# EAGLE board sprite (EAGLE 6.6.0)
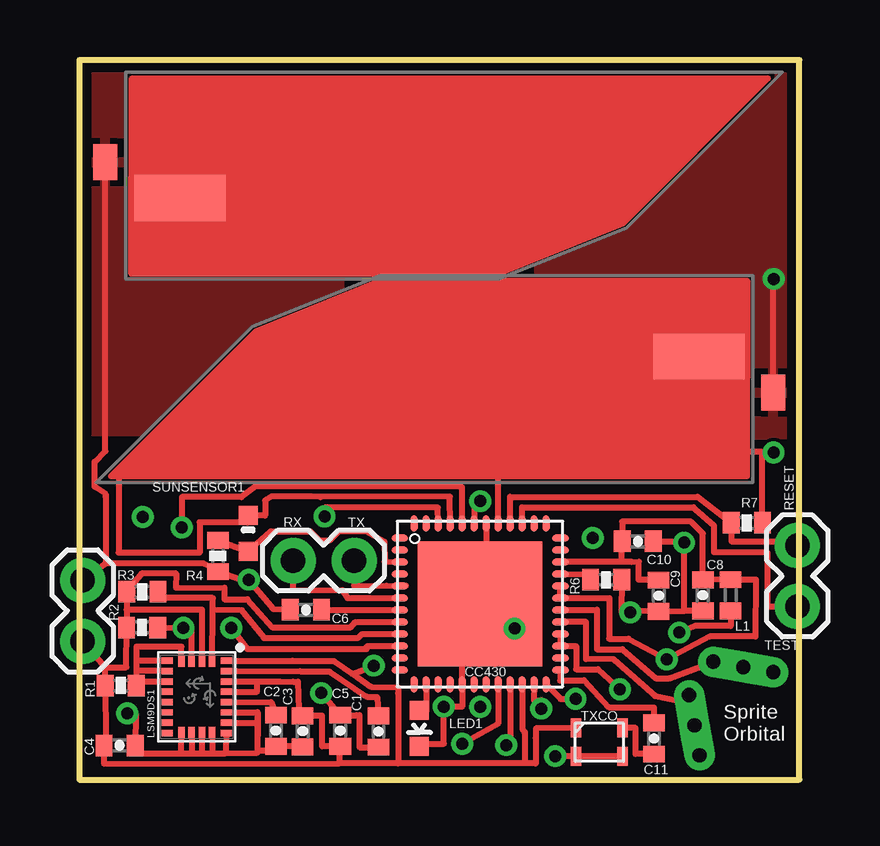
[diagram p0: board, top side]
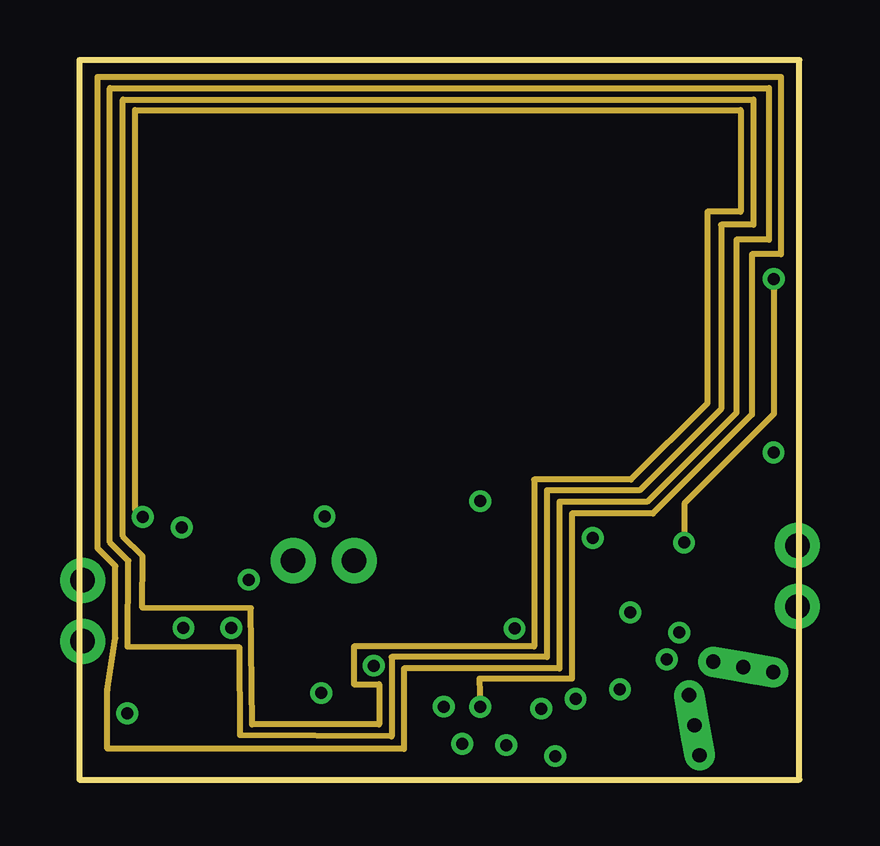
[diagram p1: board, inner layer Route2]
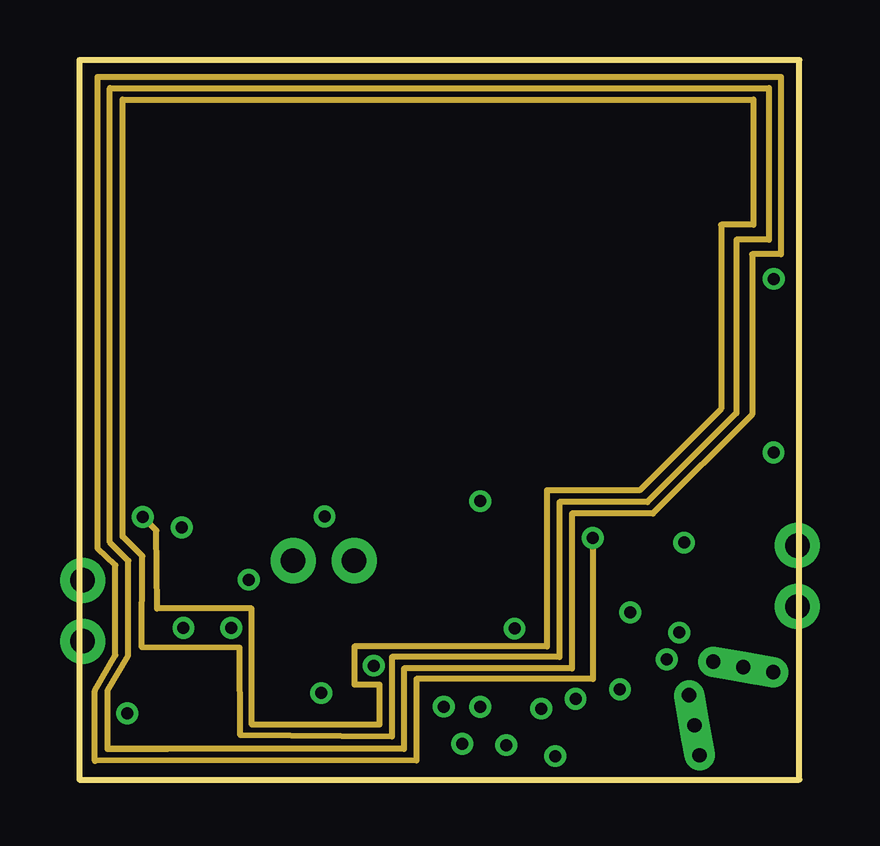
[diagram p2: board, inner layer Route15]
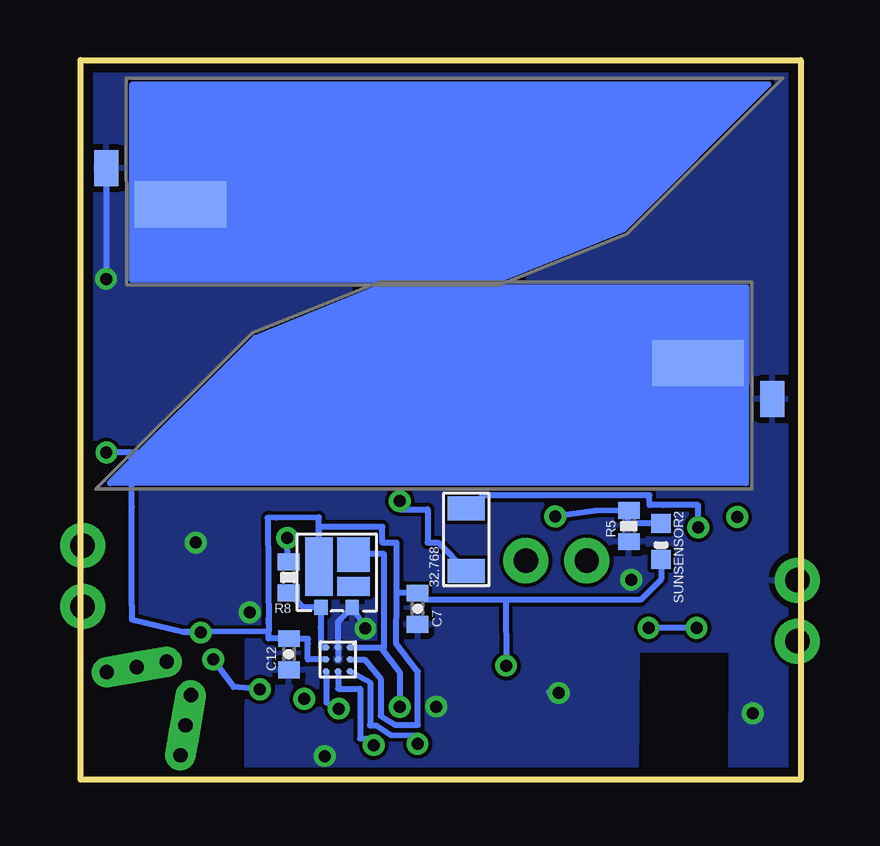
[diagram p3: board, bottom side, seen from below]

Size 30 x 30 mm. Coordinates in mm from the lower left corner, seen from the top.
Outline: 0,0 30,0 30,30 0,30 0,0
Copper layers (1*2*15*16): Top 0.035559375mm / dielectric 1.501140625mm / Route2 0.035559375mm / dielectric 0.149859375mm / Route15 0.035559375mm / dielectric 0.200659375mm / Bottom 0.035559375mm
Design rules "typical_4pcb *": minimum track width 10mil, minimum drill 15mil, track to track 6mil, track to pad 6mil, pad to pad 6mil, via to via 6mil, smd to smd 6mil, copper to edge 15mil, drill to drill 8mil, minimum pad ring 10mil, minimum via ring 8mil, stop-mask expansion 4mil, vias tented up to drill 0mil, thermal gap 10mil

## Footprints (pad centres in the part's own frame; a part is rotated, then mirrored left to right if it is on the bottom)
SPRITECRYSTAL = smd 1 x 1.55: PIN1 -1.3,0; PIN2 1.3,0
ANTENNA = drill 0.6 pad 1.27 square: IN1 0,0 | drill 0.6 pad 1.27 offset: IN2 1.27,0; IN3 -1.27,0
0402-CAP = smd 0.7 x 0.9: 1 -0.65,0; 2 0.65,0
RGZ48 = smd 0.7 x 0.3: 1 -3.35,2.75; 2 -3.35,2.25; 3 -3.35,1.75; 4 -3.35,1.25; 5 -3.35,0.75; 6 -3.35,0.25; 7 -3.35,-0.25; 8 -3.35,-0.75; 9 -3.35,-1.25; 10 -3.35,-1.75; 11 -3.35,-2.25; 12 -3.35,-2.75; 25 3.35,-2.75; 26 3.35,-2.25; 27 3.35,-1.75; 28 3.35,-1.25; 29 3.35,-0.75; 30 3.35,-0.25; 31 3.35,0.25; 32 3.35,0.75; 33 3.35,1.25; 34 3.35,1.75; 35 3.35,2.25; 36 3.35,2.75 | smd 0.3 x 0.7: 13 -2.75,-3.35; 14 -2.25,-3.35; 15 -1.75,-3.35; 16 -1.25,-3.35; 17 -0.75,-3.35; 18 -0.25,-3.35; 19 0.25,-3.35; 20 0.75,-3.35; 21 1.25,-3.35; 22 1.75,-3.35; 23 2.25,-3.35; 24 2.75,-3.35; 37 2.75,3.35; 38 2.25,3.35; 39 1.75,3.35; 40 1.25,3.35; 41 0.75,3.35; 42 0.25,3.35; 43 -0.25,3.35; 44 -0.75,3.35; 45 -1.25,3.35; 46 -1.75,3.35; 47 -2.25,3.35; 48 -2.75,3.35 | smd 5.2 x 5.2: TP 0,0
LV8417CS = smd 0.27 x 0.27: ENA 0.5,-0.5; IN1 0,-0.5; IN2 -0.5,-0.5; OUT1 0.5,0.5; OUT2 -0.5,0.5; PGND 0,0.5; SGND 0,0; VCC 0.5,0; VM -0.5,0
1X02 = drill 1.016 pad 1.88: 1 0,0; 2 2.54,0
C0402 = smd 0.7 x 0.9: 1 -0.65,0; 2 0.65,0
LED-0603 = smd 0.8 x 0.8: A 0,-0.75; C 0,0.75
LGA24-8X4 = smd 0.27 x 0.45: 1 -1.505,1.225; 6 -1.505,-1.225; 7 -1.075,-1.225; 8 -0.645,-1.225; 9 -0.215,-1.225; 10 0.215,-1.225; 11 0.645,-1.225; 12 1.075,-1.225; 13 1.505,-1.225; 18 1.505,1.225; 19 1.075,1.225; 20 0.645,1.225; 21 0.215,1.225; 22 -0.215,1.225; 23 -0.645,1.225; 24 -1.075,1.225 | smd 0.45 x 0.27: 2 -1.475,0.645; 3 -1.475,0.215; 4 -1.475,-0.215; 5 -1.475,-0.645; 14 1.475,-0.645; 15 1.475,-0.215; 16 1.475,0.215; 17 1.475,0.645
0402-RES = smd 0.7 x 0.9: 1 -0.65,0; 2 0.65,0
NSR1030QMUTAG = smd 0.55 x 0.633: GND -0.65,1.335; PIN3 0.65,1.335 | smd 1.35 x 0.8: P$2 -0.706,0.453 | smd 1.35 x 1.45: PIN1 -0.7,-0.865 | smd 1.15 x 2.45: VCC 0.738,-0.365
ALS-PT19 = smd 0.8 x 0.8: C -0.75,0; E 0.75,0
TRISOLX-T01 = smd 3.81 x 1.93: P$2 -2,5 | smd 1 x 1.5: P$3 1.1,3.5
TXC_7Z = smd 0.44 x 0.79: GND1 -0.97,-0.595; GND2 0.97,-0.595; OUT 0.97,0.595; VCC -0.97,0.595

## Placement (x,y rotation side)
32KHZ  SPRITECRYSTALSPRITECRYSTAL  [SPRITECRYSTAL]  13.93,10 90 bottom
ANTENNA1  ANTENNA  [ANTENNA]  25.63,2.26 100 top
ANTENNA2  ANTENNA  [ANTENNA]  27.66,4.69 170 top
C1  0.1uF  [0402-CAP]  12.47,2 270 top
C2  10nF  [0402-CAP]  8.2,2.04 270 top
C3  0.1uF  [0402-CAP]  9.31,2.01 270 top
C4  0.1uF  [0402-CAP]  1.68,1.42 0 top
C5  10uF  [0402-CAP]  10.87,2.04 90 top
C6  470nF  [0402-CAP]  9.44,7.08 0 top
C7  10uF  [0402-CAP]  15.96,7.12 90 bottom
C8  10nF  [0402-CAP]  25.98,7.68 270 top
C9  0.1uF  [0402-CAP]  24.14,7.67 270 top
C10  470nF  [0402-CAP]  23.27,9.93 0 top
C11  10nF  [0402-CAP]  23.95,1.71 270 top
C12  10uF  [0402-CAP]  21.32,5.23 90 bottom
CC430  CC430F513X---RGZ48  [RGZ48]  16.7,7.32 0 top
H-BRIDGE  LV8417CS  [LV8417CS]  19.28,5.01 0 bottom
JP1  [1X02]  11.45,9.13 180 top
JP2  [1X02]  0.14,5.77 90 top
JP3  [1X02]  29.92,9.75 270 top
L1  12nH  [C0402]  27.14,7.69 90 top
LED1  [LED-0603]  14.17,2.14 180 top
LSM9DS1  LSM9DS1  [LGA24-8X4]  4.89,3.45 270 top
R1  10K  [0402-RES]  1.73,3.92 180 top
R2  10K  [0402-RES]  2.62,6.34 180 top
R3  10K  [0402-RES]  2.63,7.83 180 top
R4  10K  [0402-RES]  5.77,9.32 90 top
R5  10K  [0402-RES]  7.16,10.57 90 bottom
R6  56K  [0402-RES]  21.95,8.33 180 top
R7  56K  [0402-RES]  27.81,10.7 180 top
R8  1K  [0402-RES]  21.33,8.43 270 bottom
RECTIFIER  NSR1030QMUTAG  [NSR1030QMUTAG]  19.34,8.51 180 bottom
SUNSENSOR1  LIGHTSENSORALS  [ALS-PT19]  7.04,10.26 270 top
SUNSENSOR2  LIGHTSENSORALS  [ALS-PT19]  5.82,9.93 90 bottom
TRISOL1  TRISOLX-WING  [TRISOLX-T01]  2.19,29.24 180 top
TRISOL2  TRISOLX-WING  [TRISOLX-T01]  27.82,12.64 0 top
TRISOL3  TRISOLX-WING  [TRISOLX-T01]  2.28,12.36 0 bottom
TRISOL4  TRISOLX-WING  [TRISOLX-T01]  27.84,28.98 180 bottom
TXCO  [TXC_7Z]  21.67,1.56 0 top

## Library data of the parts
32KHZ = SpriteCrystal
ANTENNA1 ANTENNA2 = SpriteAntenna
C1-C12 R1-R8 = SparkFun-Passives
CC430 = TI_MSP430_v16
H-BRIDGE = lv8417cs
JP1-JP3 L1 LED1 = SparkFun
LSM9DS1 = SparkFun-Sensors; PROD_ID: IC-12536
RECTIFIER = NSR1030QMUTAG
SUNSENSOR1 SUNSENSOR2 = SparkFun-Sensors; PROD_ID: IC-11836
TRISOL1-TRISOL4 = TriSolX_QzQube
TXCO = SpriteTCXO

## Nets
#RST/SBWTDIO: CC430.40 JP3.1 R7.2
ANT1: ANTENNA1.IN1 ANTENNA1.IN2 ANTENNA1.IN3 CC430.29
ANT2: ANTENNA2.IN1 ANTENNA2.IN2 ANTENNA2.IN3 CC430.30
COIL1: H-BRIDGE.OUT1 R8.1 RECTIFIER.PIN1
GND: C1.2 C2.2 C3.2 C4.2 C5.2 C6.1 C7.1 C8.2 C9.2 C10.2 C12.1 CC430.17 CC430.42 CC430.TP H-BRIDGE.PGND H-BRIDGE.SGND JP2.2 LED1.C LSM9DS1.14 LSM9DS1.15 LSM9DS1.16 LSM9DS1.17 LSM9DS1.18 LSM9DS1.19 LSM9DS1.20 R4.1 R5.1 R6.1 RECTIFIER.GND TRISOL1.P$3 TRISOL2.P$3 TRISOL3.P$3 TRISOL4.P$3 TXCO.GND1 TXCO.GND2
GUARD: C8.1 C9.1 C10.1 CC430.27 CC430.28 CC430.31 CC430.32 CC430.34 L1.2
LOADLINE: H-BRIDGE.OUT2 R8.2 RECTIFIER.PIN3
N$1: C1.1 LSM9DS1.24
N$2: C2.1 LSM9DS1.21
N$3: LSM9DS1.5 LSM9DS1.6 LSM9DS1.7 LSM9DS1.8 R1.1
N$4: C11.1 CC430.25
N$5: C11.2 TXCO.OUT
N$7: 32KHZ.PIN2 CC430.44
N$8: 32KHZ.PIN1 CC430.43
P1.0: CC430.13
P1.1: CC430.12
P1.2: CC430.11
P1.7: CC430.4
P2.0/A0: CC430.3 R4.2 SUNSENSOR1.E
P2.1/A1: CC430.2
P2.2/A2: CC430.1
P2.2/A4: CC430.47
P2.3/A3: CC430.48
P2.5/A5: CC430.46 R5.2 SUNSENSOR2.E
P2.6: CC430.24
P2.7: CC430.23 H-BRIDGE.IN2
P3.0: CC430.21 H-BRIDGE.IN1
P3.1: CC430.20 H-BRIDGE.ENA
P3.2: CC430.19
P3.3: CC430.18
P3.5: CC430.16
P3.6: CC430.15
P3.7: CC430.14 LED1.A
R_BIAS: CC430.33 R6.2
SCL: CC430.9 LSM9DS1.2 R3.1
SDA: CC430.10 LSM9DS1.4 R2.1
TCK_PJ.3: CC430.38
TDI_PJ.1: CC430.36
TDO_PJ.0: CC430.35
TEST/SBWTCK: CC430.39 JP3.2
TMS_PJ.2: CC430.37
UART_RX: CC430.6 JP1.2
UART_TX: CC430.5 JP1.1
VCC: C3.1 C4.1 C5.1 C7.2 C12.2 CC430.8 CC430.22 CC430.41 CC430.45 H-BRIDGE.VCC H-BRIDGE.VM JP2.1 L1.1 LSM9DS1.1 LSM9DS1.3 LSM9DS1.22 LSM9DS1.23 R1.2 R2.2 R3.2 R7.1 RECTIFIER.VCC SUNSENSOR1.C SUNSENSOR2.C TRISOL1.P$2 TRISOL2.P$2 TRISOL3.P$2 TRISOL4.P$2 TXCO.VCC
VCORE: C6.2 CC430.7

## Tracks (layer width: path | path; a pad name or v marks a point on that pad's centre or on a via)
#RST/SBWTDIO
  Top 0.254: CC430.40 17.95,11.78 25.77,11.78 R7.2 27.17,9.93 29.89,9.93 JP3.1
ANT1
  Top 0.254: ANTENNA1.IN3 ANTENNA1.IN1 ANTENNA1.IN2 25.39,3.19 24,3.48 22.26,5.02 21.12,5.02 21.12,6.57 CC430.29
ANT2
  Top 0.254: ANTENNA2.IN3 ANTENNA2.IN1 ANTENNA2.IN2 24.59,4.22 24.02,4.22 22.62,5.43 21.57,5.43 21.57,7.08 CC430.30
COIL1  (via drill 0.5)
  Route2 0.254: v2.64,10.95 2.33,11.26 2.33,27.91 27.56,27.91 27.56,23.67 26.17,23.67 26.17,15.69 22.99,12.5 18.95,12.5 18.95,5.55 11.45,5.55 11.45,3.98 12.5,3.98 12.5,2.3 7.2,2.29 7.15,7.14 2.63,7.17 2.64,9.32 1.82,10.14 1.82,28.35 28.09,28.35 28.09,23.13 26.74,23.13 26.74,15.45 23.35,12.06 19.48,12.06 19.48,5.11 13.02,5.11 13.02,1.79 6.7,1.85 6.68,5.5 2.02,5.53 2.04,9.12 1.27,9.89 1.27,28.82 28.73,28.82 28.73,22.51 27.38,22.51 27.38,15.29 23.66,11.57 20,11.57 20,4.63 13.52,4.63 13.52,1.28 1.17,1.29 1.17,3.73 1.5,5.89 1.5,8.91 0.76,9.64 0.76,29.3 29.24,29.3 29.24,21.9 28.03,21.9 28.03,15.21 23.9,11.09 20.53,11.09 20.53,4.2 16.67,4.2 v16.71,3.03
  Route15 0.254: v21.4,10.07 21.4,4.2 14.04,4.2 14.04,0.8 0.65,0.78 0.65,3.7 1.5,5.18 1.5,8.94 0.77,9.64 0.77,29.29 29.24,29.29 29.24,21.9 28.03,21.9 28.03,15.22 23.9,11.09 20.53,11.09 20.53,4.63 13.52,4.63 13.52,1.28 1.19,1.28 | 1.19,1.28 3.68,1.28 | 1.19,1.28 1.19,3.71 2.03,5.16 2.04,9.12 1.28,9.89 1.28,28.82 28.73,28.82 28.73,22.5 27.38,22.5 27.38,15.28 23.67,11.57 20,11.57 20,5.11 13.02,5.11 13.02,1.79 6.71,1.84 6.68,5.5 2.61,5.52 2.63,9.31 1.81,10.13 1.81,28.35 28.09,28.35 28.09,23.13 26.74,23.13 26.74,15.45 23.35,12.06 19.48,12.06 19.48,5.55 11.46,5.55 11.46,3.96 12.51,3.96 12.51,2.29 7.19,2.29 7.18,7.13 3.24,7.13 3.21,10.38 v2.64,10.95
  Bottom 0.254: H-BRIDGE.OUT1 17.49,5.51 | 17.49,5.51 17.35,5.51 17.35,9.4 18.64,9.4 RECTIFIER.PIN1 | 17.49,5.51 16.71,4.47 v16.71,3.03 | R8.1 21.38,9.02 v21.4,10.07
GND  (via drill 0.5)
  Top 0.254: C2.2 8.06,1.5 8.05,1.2 7.42,1.19 7.43,2.37 | C2.2 8.21,1.48 | C1.2 11.67,1.34 11.67,2.69 11.55,2.69 C5.2 v10.08,3.6 | CC430.42 16.95,9.34 18.57,9.3 CC430.TP | 7.43,2.37 7.43,2.8 LSM9DS1.20 7.42,2.8 7.42,1.12 6.09,1.09 | LSM9DS1.19 7.43,2.37 | 1.09,11.78 1.09,11.9 | 1.09,11.9 0.67,12.19 0.64,12.22 0.64,13.24 1.09,13.69 TRISOL1.P$3 | C6.1 8.1,7.1 v7.06,8.33 6.75,8.35 R4.1 5.19,9 1.11,9 | v18.14,6.29 18.07,6.16 18.34,6.43 CC430.TP | TXCO.GND1 TXCO.GND2 21.32,0.97 v19.83,0.97 | C3.2 9.32,1.39 C2.2 | v2,2.76 2.35,2.76 C4.2 2.35,1.09 4.22,1.09 | 4.22,1.09 4.68,1.09 | 4.68,1.09 5.11,1.09 | 5.11,1.09 5.54,1.09 | 5.54,1.09 6.09,1.09 | LSM9DS1.14 4.22,1.09 | LSM9DS1.15 4.68,1.09 | LSM9DS1.16 5.11,1.09 | LSM9DS1.17 5.54,1.09 | LSM9DS1.18 6.09,1.09 | v25.2,9.88 25.24,9.95 | LED1.C 14.16,1.5 15.19,1.5 v15.19,3.04 15.95,3.04 CC430.17 15.95,6.57 CC430.TP | R6.1 22.58,6.97 v22.95,6.97 22.95,7.03 C9.2 25.2,7.03 | C10.2 25.03,9.93 v25.2,9.88 | 25.26,9.91 v25.2,9.88 | 25.2,7.03 v25.2,9.88 | C8.2 25.2,7.03 | 1.09,11.9 1.11,9 | 1.11,9 JP2.2 | TRISOL2.P$3 28.92,20.87 v28.94,20.87
  Route2 0.254: v28.94,20.87 28.94,15.24 25.21,11.51 v25.21,9.88 v25.2,9.88
  Bottom 0.254: H-BRIDGE.SGND H-BRIDGE.PGND 19.28,6.58 RECTIFIER.GND v18.14,6.29 | v15.19,3.04 15.31,2.76 | v10.08,3.6 10.49,3.65 | v7.06,8.33 6.75,8.3 | v2,2.76 2.05,3.13 | v19.83,0.97 19.91,0.95 19.99,0.86 | v25.2,9.88 25.16,9.85 | v22.95,6.97 23.04,6.97 | TRISOL4.P$3 v28.94,20.87
  pour Bottom: 0.03,29.71 30.07,29.63 30.01,6.13 23.05,6.01 23.08,0.11 6.85,0.23 6.82,5.4 2.88,5.42 2.92,0.12 -0.17,0.17 -0.17,14.99
  pour Top: 0.08,14.52 30.04,14.36 29.85,29.72 0.11,29.79 0.09,14.54
GUARD  (via drill 0.5)
  Top 0.254: CC430.28 CC430.27 20.7,5.57 20.7,4.59 21.61,4.59 v22.53,3.77 | CC430.32 CC430.31 22.08,7.57 22.08,5.87 22.88,5.87 v24.48,5.01 26.26,5.97 28.17,5.96 28.19,8.34 L1.2 C8.1 25.98,10.25 25.48,10.75 22.62,10.75 C10.1 22.58,9.81 22.59,9.09 | 22.59,9.09 23.01,9.07 23,9.08 CC430.34 | 22.59,9.09 23.32,9.07 | 23.32,9.07 23.29,9.02 | C9.1 23.31,8.32 23.32,9.07
  Bottom 0.254: 24.4,5.08 v24.48,5.01 23.62,3.86 v22.53,3.77
LOADLINE
  Bottom 0.254: 19.99,6.32 RECTIFIER.PIN3 20.73,7.17 R8.2 | 19.99,6.32 19.99,5.51 H-BRIDGE.OUT2 | 20.01,6.35 19.99,6.32
N$1
  Top 0.254: LSM9DS1.24 6.56,4.53 9.2,4.52 10.42,4.5 11.98,3.45 12.41,3.44 12.45,2.66 C1.1
N$2
  Top 0.254: LSM9DS1.21 8,3.22 C2.1
N$3
  Top 0.254: LSM9DS1.5 | R1.1 2.38,4.09 | 2.38,4.09 2.38,4.52 LSM9DS1.7 | 2.38,4.09 LSM9DS1.8 | LSM9DS1.6 2.38,4.95 R1.1 | LSM9DS1.5 4.25,5.54 2.38,5.54 R1.1
N$4
  Top 0.254: CC430.25 20.04,4.12 21.03,4.14 22.07,3.02 23.94,3 C11.1
N$5
  Top 0.254: C11.2 23.18,1.07 23.18,2.15 22.77,2.15 TXCO.OUT
N$7  (via drill 0.5)
  Top 0.254: CC430.44 15.94,10.65 15.94,12.19 15.67,12.23 7.34,12.22 6.75,11.78 4.28,11.78 4.28,11.1 v4.27,10.51
  Bottom 0.254: v4.27,10.51 4.27,11.45 5.71,11.44 6.29,11.45 6.3,11.85 13.2,11.85 32KHZ.PIN2
N$8  (via drill 0.5)
  Top 0.254: v16.7,11.61 16.46,11.47 16.45,11.44 CC430.43
  Bottom 0.254: v16.7,11.61 16.71,11.27 15.54,11.27 15.54,9.88 15.11,9.88 32KHZ.PIN1
P2.0/A0
  Top 0.254: CC430.3 12.72,9.09 12.71,9.92 11.91,10.36 10.82,10.36 10.44,9.97 10,9.97 9.62,10.35 7.98,10.35 SUNSENSOR1.E R4.2
P2.5/A5  (via drill 0.5)
  Top 0.254: CC430.46 14.94,11.34 10.23,11.34 v10.22,10.97
  Bottom 0.254: SUNSENSOR2.E 7.19,10.68 R5.2 8.57,11.2 v10.22,10.97
P2.6  (via drill 0.5)
  Top 0.254: CC430.24 20.06,3.36 v20.68,3.36
P2.7  (via drill 0.5)
  Top 0.254: CC430.23 18.94,3.31 19.25,3.31 v19.24,2.96
  Bottom 0.254: 19.25,3.03 v19.24,2.96 19.76,3.22 H-BRIDGE.IN2
P3.0  (via drill 0.5)
  Top 0.254: CC430.21 17.95,1.52 v17.79,1.44
  Bottom 0.254: 17.77,1.46 v17.79,1.44 18.1,1.7 18.36,1.71 18.35,3.79 19.28,3.79 H-BRIDGE.IN1
P3.1  (via drill 0.5)
  Top 0.254: CC430.20 17.45,2.33 v15.96,1.49
  Bottom 0.254: H-BRIDGE.ENA 17.94,4.05 17.94,2.29 17.94,2.25 17.68,2.25 17.07,1.85 15.96,1.84 v15.96,1.49
P3.7
  Top 0.254: CC430.14 14.45,2.82 LED1.A
R_BIAS
  Top 0.254: CC430.33 21.11,8.55 R6.2
SCL
  Top 0.254: CC430.9 11.78,6.07 11.63,5.91 7.71,5.9 6.78,7.06 5.56,7.08 | LSM9DS1.2 5.56,7.08 | 5.56,7.08 5.57,7.57 3.22,7.58 R3.1
SDA  (via drill 0.5)
  Top 0.254: v6.34,6.33 7,5.44 10.89,5.44 11.96,5.45 12,5.57 CC430.10 | R2.1 v4.34,6.32 4.14,6.32 4.66,6.27 4.66,4.92 LSM9DS1.4
  Bottom 0.254: v4.34,6.32 v6.34,6.33
TEST/SBWTCK
  Top 0.254: CC430.39 18.45,11.35 25.58,11.35 25.66,11.28 26.44,10.59 26.44,9.48 28.66,9.48 28.66,7.22 JP3.2
UART_RX
  Top 0.254: CC430.6 13.31,7.57 11.18,7.57 10.96,7.89 8.89,7.9 JP1.2
UART_TX
  Top 0.254: CC430.5 13.6,8.08 12.8,8.09 11.45,8.08 JP1.1
VCC  (via drill 0.5)
  Top 0.254: CC430.8 13.23,6.57 11.51,6.57 11.31,6.35 8.04,6.35 7,7.51 6.04,7.51 6.04,8 4.03,8 4.03,8.59 2.6,8.59 R3.2 1.98,7.08 | CC430.45 15.45,10.62 15.44,11.79 10.04,11.78 9.67,11.81 8.03,11.81 7.74,11.63 7.74,11.01 SUNSENSOR1.C 7.14,10.93 7.01,10.72 5.01,10.72 5.01,9.45 1.64,9.45 1.65,11.63 1.65,12.81 7.43,17.43 | 10.86,0.69 C5.1 10.1,1.39 10.12,1.39 10.12,2.66 C3.1 9.44,2.51 9.14,2.93 9.11,4.08 8.91,4.08 8.37,4.09 7.41,4.08 | LSM9DS1.23 7.41,4.08 | 13.29,0.67 19.02,0.68 18.98,0.69 18.99,0.68 | 13.29,0.67 10.86,0.69 | LSM9DS1.1 8.88,4.95 9.54,4.95 10.44,4.95 10.61,4.95 11.39,4.4 | 11.39,4.4 12.15,3.87 13.29,3.84 13.29,3.6 13.29,0.67 | LSM9DS1.22 7.41,3.66 7.41,4.08 | TXCO.VCC 19.03,2.13 19.02,1.73 19.03,0.68 18.99,0.68 | 1.08,4.68 R1.2 1.1,1.73 C4.1 1.03,0.66 10.86,0.69 | 1.08,4.68 1.97,4.68 R2.2 1.98,7.08 | 1.98,7.08 5.11,7.08 LSM9DS1.3 | LSM9DS1.3 | CC430.22 18.46,2.1 18.57,1.97 18.56,0.69 18.99,0.68 | 7.43,17.43 9.1,18.2 | 9.1,18.2 18.43,22.47 | 7.43,17.43 7.41,17.43 17.44,15.6 17.45,15.59 CC430.41 | 9.1,18.2 22.94,18.2 22.94,18.61 24.7,18.61 24.7,14.72 26.84,14.7 27.2,14.69 27.41,14.74 27.52,13.65 | L1.1 27.14,6.47 27.14,6.4 25.64,6.4 25.01,6.12 v25,6.13 | JP2.1 1.08,4.68 | 11.39,4.4 v12.27,4.75 | 27.52,13.65 27.62,12.79 | R7.1 28.46,13.63 | 28.46,13.63 v28.93,13.63 | 28.46,13.63 28.46,13.65 27.52,13.65
  Top 0.406: TRISOL2.P$2 TRISOL1.P$2 18.43,22.47 14.29,22.05 16.32,18.3
  Bottom 0.254: RECTIFIER.VCC | H-BRIDGE.VCC 18.16,5.01 17.5,4.2 17.5,2.66 16.89,2.28 16.84,2.27 15.95,2.28 15.95,4.51 15.97,4.52 16.84,5.65 16.83,7.79 | 16.83,7.79 16.83,8.87 16.83,9.87 17.43,9.87 17.43,10.55 20.06,10.55 20.03,8.87 | 22.6,16.8 12.39,18.7 20.88,27.2 TRISOL4.P$2 TRISOL3.P$2 2.64,16.75 | 22.6,16.8 23.94,14.73 | 25.71,6.15 27.87,6.67 27.86,7.24 27.86,11.37 27.87,12.45 27.87,13.63 v28.93,13.63 27.15,13.62 22.6,16.8 | 25.71,6.15 24.98,6.15 | 22.18,6.71 22.16,6.18 | 22.16,6.18 25.05,6.16 | 25.05,6.16 25.71,6.15 | RECTIFIER.VCC 20.08,10.93 21.84,10.91 22.13,10.92 22.17,10.9 | 22.17,10.9 22.21,10.91 22.16,6.18 | RECTIFIER.VCC 20.03,8.87 | 20.03,8.87 20.03,8.86 | 22.2,10.82 22.17,10.92 22.17,10.9 | 16.83,7.79 16.83,7.77 C7.2 15.69,7.5 12.29,7.5 | SUNSENSOR2.C 5.82,8.35 6.67,7.5 12.29,7.5 | H-BRIDGE.VM 20.54,5.01 20.54,5.66 20.54,5.86 20.54,5.88 C12.2 22.16,5.88 22.16,6.18 | v25,6.13 25.02,6.02 25,6.1 25.05,6.16 | 12.33,4.87 v12.27,4.75 12.29,7.5
VCORE
  Top 0.254: C6.2 10.08,6.95 10.36,7.08 13.15,7.07 CC430.7

## Text on the board
tPlace: RX | TX | RESET | TEST | Sprite / Orbital